# Altium PCB CW308T_to_cardedge.PcbDoc
Units mm, origin at the board's own origin, x right, y up, seen from the top; angles counter-clockwise.
Board outline 58.68 x 84.18 mm, 2 copper layers (Top Layer, Bottom Layer), stack 1.569 mm thick; 4 components, 54 nets, 147 pads, 57 vias.
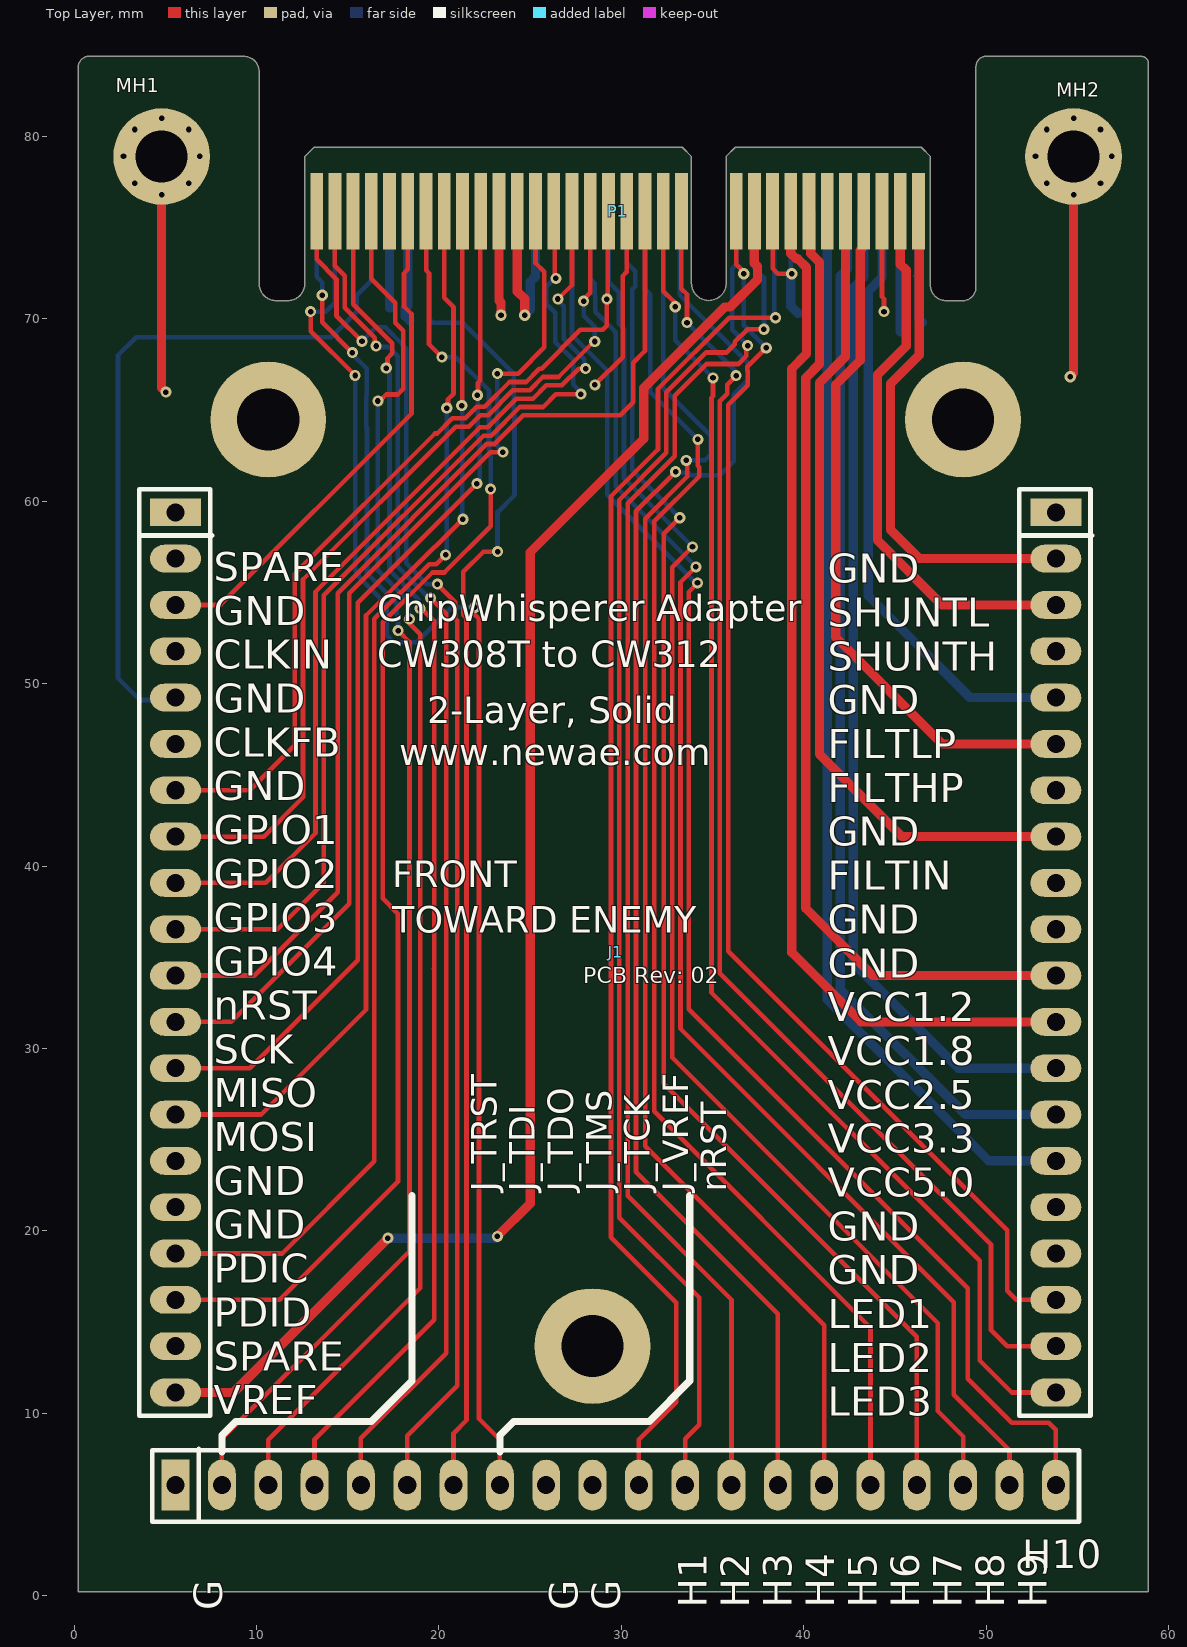
[diagram p0: Top Layer view]
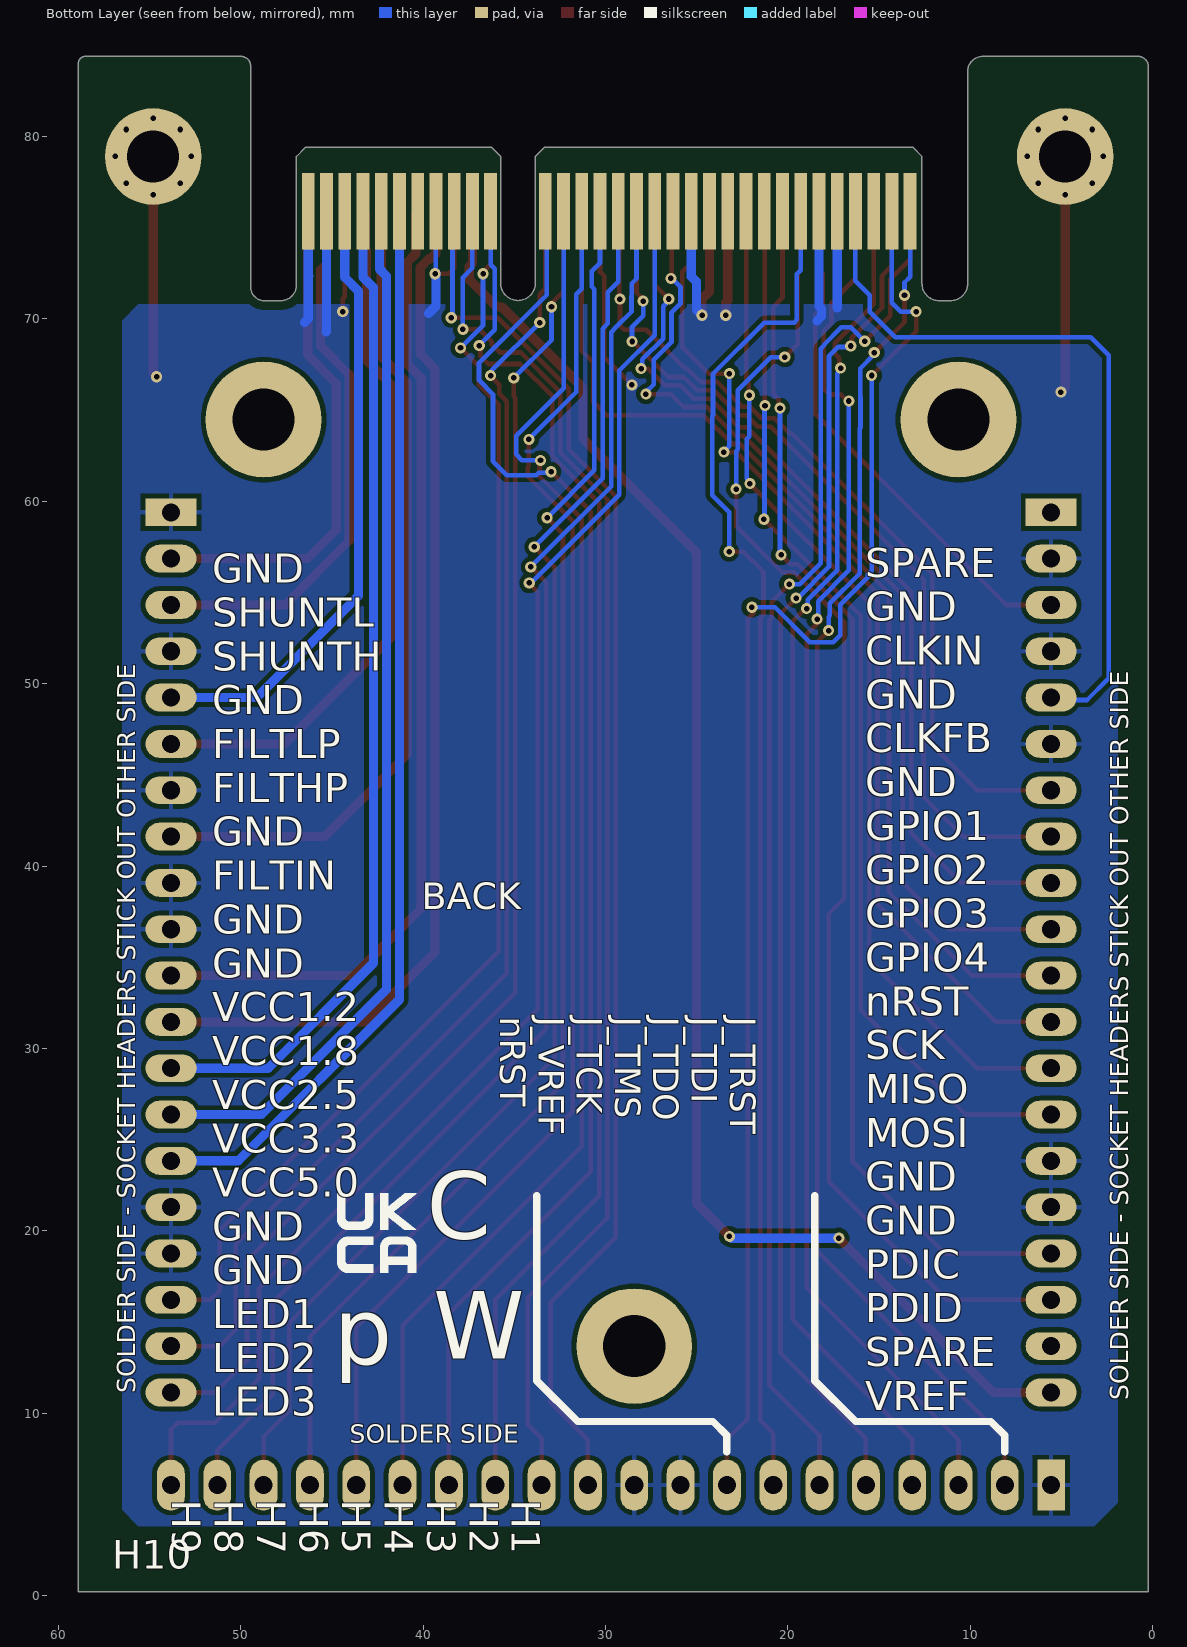
[diagram p1: Bottom Layer view, seen from below]

## Layer stack, top to bottom
Top Solder: solder mask 0.0254, SM-002, Dk 4
Top Layer: signal copper 0.035
Dielectric 1: core 1.4986, Core-043, Dk 4.3
Bottom Layer: signal copper 0.035
Bottom Solder: solder mask 0.0254, SM-002, Dk 4

## Board outline
11.078,71 cw(c11.078,71.935) 10.143,71.935 10.143,83.557 ccw(c9.3,83.557) 9.3,84.4 0.8,84.4 ccw(c0.8,83.825) 0.225,83.825 0.225,0.217 58.899,0.217 58.899,83.148 ccw(c58.899,83.149) 58.9,83.149 58.9,84 ccw(c58.5,84) 58.5,84.4 50,84.4 ccw(c50,83.843) 49.443,83.843 49.443,71.743 cw(c48.7,71.743) 48.7,71 47.8,71 cw(c47.8,71.857) 46.943,71.857 46.943,78.909 46.443,79.409 36.243,79.409 35.743,78.909 35.743,71.959 cw(c34.793,71.959) 33.843,71.959 33.843,78.909 33.343,79.409 13.143,79.409 12.643,78.909 12.643,71.943 cw(c11.7,71.943) 11.7,71

## Design rules (kind name [scope] priority, off if disabled: settings)
BoardOutlineClearance Silk_to_Outline [(OnLayer('Top Overlay'))] p1: gap=0 ignorepadtopadclearanceinfootprint=FALSE
BoardOutlineClearance [All] p2: gap=0.508 ignorepadtopadclearanceinfootprint=FALSE except(0.1: SMDPad-OutlineEdge SMDPad-CavityEdge SMDPad-CutoutEdge SMDPad-SplitBarrior SMDPad-SplitContinuation; 0.203: Track-OutlineEdge Track-CavityEdge Track-CutoutEdge Track-SplitBarrior Track-SplitContinuation)
Clearance Clearance_Power [InNet('+*') OR InNet('-*') OR InNet('GND')] p1: gap=0.254 ignorepadtopadclearanceinfootprint=FALSE
Clearance [All] p2: gap=0.203 ignorepadtopadclearanceinfootprint=FALSE except(0: Arc-Hole Track-Hole SMDPad-Hole THPad-Hole Via-Hole Fill-Hole Poly-Hole Region-Hole Text-Hole)
HoleSize [All] p1: absolutevalues=TRUE maxlimit=5.08 minlimit=0.025 maxpercent=80.000 minpercent=20.000
MinimumSolderMaskSliver [All] p1: minsoldermaskwidth=0.127
PlaneConnect PlaneConnect_viaDirect [IsVia] p1: planeconnectstyle=Direct reliefexpansion=0.508 reliefentries=4 reliefconductorwidth=0.254 reliefairgap=0.254
PlaneConnect [All] p2: planeconnectstyle=Relief reliefexpansion=0.508 reliefentries=4 reliefconductorwidth=0.254 reliefairgap=0.254
PolygonConnect PolygonConnect_viaDirect [All vs isVia] p1: connectstyle=Direct reliefconductorwidth=0.254 reliefentries=4 polygonreliefangle="90 Angle" airgapwidth=0.254
PolygonConnect [All] p2: connectstyle=Relief reliefconductorwidth=0.254 reliefentries=4 polygonreliefangle="90 Angle" airgapwidth=0.254
RoutingVias [All] p1: holewidth=0.711 width=1.27 viastyle="Through Hole" minholewidth=0.305 minwidth=0.61 maxholewidth=2.54 maxwidth=12.7
SilkToSilkClearance [All] p1: silktosilkclearance=0.127
SilkToSolderMaskClearance [IsPad] p1: minsilkscreentomaskgap=0.127 clearancetoexposedcopper=TRUE
SolderMaskExpansion [All] p1: expansion=0.102 istentingtop=FALSE
Width [All] p1: maxlimit=2.54 minlimit=0.152 preferedwidth=0.203 minimp=50.000000 maximp=50.000000 favimp=50.000000
25 further rules are at their usual default settings.

## Classes and differential pairs
component class "Edge Connector": P1

## Components (designator, comment, footprint, x,y, rotation, side; value= is the part's Value field where it differs from the comment)
J1 "CW308_TARGETCON" CW308_TBOARD_CONN 5.559,59.399 r0 top locked
MH1 "4-40 MH, Tight Fit" MOUNT_#4_TIGHT 4.793,78.909 r0 top
MH2 "4-40 MH, Tight Fit" MOUNT_#4_TIGHT 54.793,78.909 r0 top
P1 "PCIeX4-GF-2D-1000-1K-O64" PCIeX4-GF-2D-1000-1K-O64 36.793,75.909 r180 top

## Footprints (in the part's own frame and the unit in brackets; to place one, negate y for a bottom-side part, rotate by r counter-clockwise, add the part's x,y. Pads: shape width x height; smd on the part's side, far side on the other; paste and mask are expansions set on the pad)
CW308_TBOARD_CONN [mil]
  rect 110x60 hole 39: A1(0,0) C1(1900,0)
  oval 110x60 hole 39: A2(0,-100) A3(0,-200) A4(0,-300) A5(0,-400) A6(0,-500) A7(0,-600) A8(0,-700) A9(0,-800) A10(0,-900) A11(0,-1000) A12(0,-1100) A13(0,-1200) A14(0,-1300) A15(0,-1400) A16(0,-1500) A17(0,-1600) A18(0,-1700) A19(0,-1800) A20(0,-1900) C2(1900,-100) C3(1900,-200) C4(1900,-300) C5(1900,-400) C6(1900,-500) C7(1900,-600) C8(1900,-700) C9(1900,-800) C10(1900,-900) C11(1900,-1000) C12(1900,-1100) C13(1900,-1200) C14(1900,-1300) C15(1900,-1400) C16(1900,-1500) C17(1900,-1600) C18(1900,-1700) C19(1900,-1800) C20(1900,-1900)
  rect 60x110 hole 39: B1(0,-2100)
  oval 60x110 hole 39: B2(100,-2100) B3(200,-2100) B4(300,-2100) B5(400,-2100) B6(500,-2100) B7(600,-2100) B8(700,-2100) B9(800,-2100) B10(900,-2100) B11(1000,-2100) B12(1100,-2100) B13(1200,-2100) B14(1300,-2100) B15(1400,-2100) B16(1500,-2100) B17(1600,-2100) B18(1700,-2100) B19(1800,-2100) B20(1900,-2100)
  round 250 hole 134: MH1(200,200) MH2(900,-1800) MH2(1700,200)
  silkscreen extent -79,-2179 1979,50, body extent -50,-2149 1950,50, height 248
MOUNT_#4_TIGHT [mil]
  round 14 hole 12: 1(-82.21,0) 1(-58.13,-58.13) 1(-58.13,58.13) 1(0,-82.21) 1(0,82.21) 1(0,82.21) 1(58.13,-58.13) 1(58.13,58.13) 1(82.21,0)
  round 208.66 hole 112.2: 1(0,0)
PCIeX4-GF-2D-1000-1K-O64 [mm] "Golden finger, PCIeX4, Dual, Opposite, Pitch 1mm, 64-Position"
  rect 0.7x4.2 smd far side paste-1: A1(-9.5,0) A2(-8.5,0) A3(-7.5,0) A4(-6.5,0) A5(-5.5,0) A6(-4.5,0) A7(-3.5,0) A8(-2.5,0) A9(-1.5,0) A10(-0.5,0) A11(0.5,0) A12(3.5,0) A13(4.5,0) A14(5.5,0) A15(6.5,0) A16(7.5,0) A17(8.5,0) A18(9.5,0) A19(10.5,0) A20(11.5,0) A21(12.5,0) A22(13.5,0) A23(14.5,0) A24(15.5,0) A25(16.5,0) A26(17.5,0) A27(18.5,0) A28(19.5,0) A29(20.5,0) A30(21.5,0) A31(22.5,0) A32(23.5,0)
  rect 0.7x4.2 smd paste-1: B1(-9.5,0) B2(-8.5,0) B3(-7.5,0) B4(-6.5,0) B5(-5.5,0) B6(-4.5,0) B7(-3.5,0) B8(-2.5,0) B9(-1.5,0) B10(-0.5,0) B11(0.5,0) B12(3.5,0) B13(4.5,0) B14(5.5,0) B15(6.5,0) B16(7.5,0) B17(8.5,0) B18(9.5,0) B19(10.5,0) B20(11.5,0) B21(12.5,0) B22(13.5,0) B23(14.5,0) B24(15.5,0) B25(16.5,0) B26(17.5,0) B27(18.5,0) B28(19.5,0) B29(20.5,0) B30(21.5,0) B31(22.5,0) B32(23.5,0)

## Part data
J1: library part CW308_TBOARD, "CW308 \"Standard\" Target Board Connector", Component Group=Mechanical, Component Type=Standard, Mounting Technology=Through-hole, Part Number=CW308_TBOARD, Pin Count=60, Pitch=2.54mm
MH1 MH2: library part MOUNT_#4_TIGHT, "Machine screw 4-40 Mounting Hole", Component Group=Mechanical, Component Type=Mechanical, Part Number=MOUNT_#4_TIGHT, Pin Count=1, PP Material Stack=0, PP Rotation=0
P1: library part CMP-0001-00031-2, "Golden finger, PCIeX4, Dual, Opposite, Pitch 1mm, 64-Position", ClassName="Edge Connector", Datasheet Version="rev2.0, Apr-2007", Mating Connector=Molex-87715-9106, Package Reference=PCIeX4-GF-2D-1000-1K-O64, Publisher=Altium

## Via types
v1: diameter 0.61, hole 0.305, Top Layer to Bottom Layer, 57 vias

## Nets (pads, with @x,y where several pads share a name; then routed paths per layer and width w, separated by ;. In a path a pad name is that pad's centre, name@x,y a point inside that pad or via, vN(x,y) a via of type N, cw(c..) or ccw(c..) an arc to the next point about the centre after c; other vN are vias at no path point)
CLKIN: J1.A5 P1.A29 | length 41.3
  Bottom Layer w0.254: J1.A5 5.425,49.105 3.595,49.105 2.4,50.3 2.4,68 3.4,69 14.1,69 15.5,70.4 15.5,71.3 16.293,72.093 P1.A29
CLKIN_n: P1.A30
CLKOUT: J1.A3 P1.B27 | length 28.6
  Top Layer w0.254: J1.A3 8.019,54.319 18.492,64.792 18.492,70.272 18.081,70.683 18.081,72.51 18.293,72.722 P1.B27
CLKOUT_n: P1.B28
FILT_HP: J1.C6 P1.B4 | length 38.5
  Top Layer w0.508: P1.B4 43.197,75.813 43.197,73.862 43.1,73.765 43.1,67.74 41.754,66.394 41.754,52.546 47.601,46.699 J1.C6
FILT_LP: J1.C5 P1.A3 | length 34
  Bottom Layer w0.508: P1.A3 44.293,72.286 43.532,71.525 43.532,54.827 49.12,49.239 J1.C5
FILTIN: J1.C8 P1.B5 | length 45.2
  Top Layer w0.508: P1.B5 42.293,67.939 40.86,66.506 40.86,46.14 45.381,41.619 J1.C8
GND: J1.A2 J1.A4 J1.A6 J1.A15 J1.A16 J1.B1 J1.B9 J1.B10 J1.C1 J1.C4 J1.C7 J1.C9 J1.C10 J1.C16 J1.C17 MH1.1 MH2.1 P1.A1 P1.A2 P1.A8 P1.A20 P1.A27 P1.A28 P1.B3 P1.B9 P1.B15 P1.B21 P1.B22 | length 96.7
  Top Layer w0.254: v1@23.332,70.268 v1(23.4,70.2) ; v1(28.546,66.384) 30.07,67.908 30.07,72.353 30.293,72.576 P1.B15 ; P1.B9 38.293,72.766 38.579,72.48 v1(39.341,72.48) ; P1.B3 44.293,71.213 44.4,71.106 v1(44.4,70.4)
  Top Layer w0.508: MH1.1@4.793,78.909 4.793,76.821 4.793,66.225 v1(5.029,65.989) ; P1.B22 23.293,71.007 23.4,70.9 v1(23.4,70.2) ; P1.B21 24.293,71.507 24.7,71.1 v1(24.7,70.2) ; v1(54.61,66.827) 54.61,66.855 54.793,67.038 MH2.1@54.793,78.909
  Bottom Layer w0.254: P1.A8 39.293,72.528 v1(39.341,72.48) ; 46.13,72.353 46.198,72.421 46.198,75.814 P1.A1
  Bottom Layer w0.508: P1.A28 17.293,70.607 17.3,70.6 ; P1.A27 18.293,70.698 18.158,70.563 18.158,70.142 18.4,69.9 ; v1(24.7,70.2) 24.702,70.2 25,70.498 25,72.035 25.293,72.328 P1.A20 ; v1@39.293,72.528 39.293,70.707 39.7,70.3 ; P1.A2 45.293,69.307 45.3,69.3 ; P1.A1 46.293,70.007 46.5,69.8
GPIO1/TX: J1.A7 P1.B16 | length 46
  Top Layer w0.254: J1.A7 9.623,44.159 12.087,46.623 12.087,56.021 19.783,63.717 19.898,63.717 20.737,64.555 21.452,64.555 22.08,65.183 22.508,65.183 23.867,66.543 24.777,66.543 25.507,67.273 25.625,67.273 27.751,69.399 28.973,69.399 29.203,69.629 v1(29.203,71.083) 29.201,71.083 29.247,71.129 29.247,75.863 P1.B16
GPIO2/RX: J1.A8 P1.B17 | length 48.8
  Top Layer w0.254: J1.A8 10.385,41.619 12.544,43.778 12.544,55.716 20.926,64.098 21.642,64.098 22.27,64.726 22.697,64.726 24.057,66.086 24.966,66.086 25.696,66.816 26.553,66.816 28.501,68.764 v1(28.538,68.764) ; v1(27.933,70.978) 27.933,71.074 28.293,71.434 P1.B17
  Bottom Layer w0.254: v1(27.933,70.978) 27.933,70.174 28.538,69.568 v1(28.538,68.764)
GPIO3: J1.A9 P1.B18 | length 51.5
  Top Layer w0.254: J1.A9 10.512,39.079 13.23,41.797 13.23,55.04 22.25,64.06 22.678,64.06 24.246,65.628 25.156,65.628 25.886,66.359 26.743,66.359 27.657,67.273 v1(28.038,67.273) ; v1(26.524,71.093) 27.293,71.862 P1.B18
  Bottom Layer w0.254: v1(26.524,71.093) 26.524,70.997 26.836,70.686 26.836,68.922 27.97,67.788 27.97,67.341 v1(28.038,67.273)
GPIO4/TRIG: J1.A10 P1.B19 | length 54.7
  Top Layer w0.254: J1.A10 11.147,36.539 13.687,39.079 13.687,54.85 22.44,63.603 22.867,63.603 24.435,65.171 25.709,65.171 26.414,65.876 v1(27.784,65.876) ; P1.B19 26.353,75.849 26.353,72.286 v1(26.412,72.226)
  Bottom Layer w0.254: v1(26.412,72.226) 26.356,72.226 25.885,71.755 25.885,70.835 26.379,70.341 26.379,68.732 27.352,67.759 27.352,66.404 27.784,65.972 v1(27.784,65.876)
HDR1: J1.B11 P1.A9 | length 77.5
  Top Layer w0.254: J1.B11 30.959,8.559 33.013,10.613 33.013,16.07 29.428,19.655 29.428,60.264 32.009,62.844 32.009,66.164 35.912,70.067 v1(38.452,70.067)
  Bottom Layer w0.254: P1.A9 38.384,75.818 38.384,70.135 v1(38.452,70.067)
HDR2: J1.B12 P1.A10 | length 76.7
  Top Layer w0.254: J1.B12 33.499,8.599 34.261,9.361 34.261,16.346 29.886,20.721 29.886,60.075 32.466,62.655 32.466,65.974 34.654,68.162 35.785,68.162 36.225,68.602 36.225,68.738 36.919,69.432 v1(37.817,69.432)
  Bottom Layer w0.254: P1.A10 37.293,72.793 37.817,72.269 v1(37.817,69.432)
HDR3: J1.B13 P1.A11 | length 76.4
  Top Layer w0.254: J1.B13 36.039,16.219 30.343,21.915 30.343,59.885 32.923,62.466 32.923,65.785 34.665,67.527 36.408,67.527 36.851,67.97 36.851,68.466 v1(36.919,68.534)
  Bottom Layer w0.254: P1.A11 36.293,72.963 36.073,72.743 36.073,69.398 36.919,68.552 v1(36.919,68.534)
HDR4: J1.B14 P1.A12 | length 78.9
  Top Layer w0.254: v1(32.978,61.622) 30.8,59.445 30.8,23.236 38.579,15.457 J1.B14
  Bottom Layer w0.254: v1(32.978,61.622) 33.042,61.558 33.663,61.558 33.79,61.431 35.404,61.431 36.166,62.193 36.166,65.867 36.928,66.629 36.928,67.594 33.208,71.314 33.208,75.824 P1.A12
HDR5: J1.B15 P1.A13 | length 77.1
  Top Layer w0.254: v1(33.558,62.244) 33.613,62.189 33.613,61.359 31.3,59.047 31.3,24.641 41.119,14.822 J1.B15
  Bottom Layer w0.254: P1.A13 32.293,66.193 34.896,63.59 34.896,62.571 34.586,62.261 33.575,62.261 v1(33.558,62.244)
HDR6: J1.B16 P1.A14 | length 77
  Top Layer w0.254: v1(34.193,63.395) 34.193,61.951 34.261,61.883 34.261,61.361 31.8,58.9 31.8,26.554 43.659,14.695 J1.B16
  Bottom Layer w0.254: P1.A14 31.293,71.647 31.594,71.346 31.594,65.994 v1(34.193,63.395)
HDR7: J1.B17 P1.A15 | length 77.3
  Top Layer w0.254: v1(33.199,59.099) 32.328,58.228 32.328,28.058 46.199,14.187 J1.B17
  Bottom Layer w0.254: P1.A15 30.293,73.088 30.756,72.626 30.756,71.778 30.603,71.625 30.603,61.695 v1(33.199,59.099)
HDR8: J1.B18 P1.A16 | length 78.8
  Top Layer w0.254: v1(33.9,57.5) 32.786,56.386 32.786,29.505 47.342,14.949 47.342,10.123 48.739,8.726 J1.B18
  Bottom Layer w0.254: P1.A16 29.293,72.033 29.867,71.459 29.867,69.75 30.146,69.471 30.146,61.254 v1(33.9,57.5)
HDR9: J1.B19 P1.A17 | length 80.1
  Top Layer w0.254: v1(34.091,56.409) 33.243,55.562 33.243,31.08 48.231,16.092 48.231,11.012 51.279,7.964 J1.B19
  Bottom Layer w0.254: P1.A17 28.293,72.197 28.546,71.944 28.546,71.263 28.568,71.241 28.568,70.404 29.379,69.594 29.379,69.592 29.689,69.282 29.689,60.811 v1(34.091,56.409)
HDR10: J1.B20 P1.A18 | length 82.5
  Top Layer w0.254: v1(34.176,55.524) 34.176,55.506 33.7,55.03 33.7,32.147 48.993,16.854 48.993,11.901 51.406,9.488 53.438,9.488 53.819,9.107 J1.B20
  Bottom Layer w0.254: P1.A18 27.293,69.111 29.232,67.172 29.232,60.37 33.827,55.774 33.829,55.774 34.08,55.524 v1(34.176,55.524)
IOVREF: J1.A20 P1.B10 | length 83.5
  Top Layer w0.508: J1.A20 8.739,11.139 v1(17.2,19.6) ; v1(23.2,19.7) 25,21.5 25,57.2 31.233,63.433 31.233,66.214 35.67,70.651 35.957,70.651 37.47,72.164 37.47,72.87 37.293,73.047 P1.B10
  Bottom Layer w0.508: v1(17.2,19.6) 23.1,19.6 v1(23.2,19.7)
JTAG_nRST: J1.B8 P1.A31 | length 80.6
  Top Layer w0.254: v1(12.965,70.4) 12.965,69.335 v1(15.4,66.9) ; v1(21.967,54.192) 21.899,54.124 21.899,53.889 21.883,53.873 22.196,53.56 22.196,9.704 23.339,8.561 J1.B8
  Bottom Layer w0.254: v1(12.965,70.4) 13.797,70.4 14.293,70.896 P1.A31 ; v1(15.4,66.9) 15.4,56.2 15.6,56 15.6,55.853 17.127,54.327 17.127,52.651 17.499,52.279 18.79,52.279 20.703,54.192 v1(21.967,54.192)
JTAG_TCK: J1.B6 P1.B32 | length 76.3
  Top Layer w0.254: P1.B32 13.293,73.264 14.379,72.178 14.379,70.18 v1(15.78,68.778) ; J1.B6 18.259,8.759 21,11.5 21,53.462 20.875,53.587 20.875,54.497 v1(19.91,55.462)
  Bottom Layer w0.254: v1(15.78,68.778) 16.537,69.535 17.063,69.535 18,68.598 18,68.571 18.2,68.371 18.2,56.6 19.338,55.462 v1(19.91,55.462)
JTAG_TDI: J1.B3 P1.B29 | length 76
  Top Layer w0.254: J1.B3 10.639,8.539 18.97,16.87 18.97,52.719 v1@18.174,53.515 ; P1.B29 16.293,72.204 17.6,70.897 17.6,69.794 18.035,69.359 18.035,66.161 17.733,65.859 17.106,65.859 16.747,65.5 v1(16.651,65.5)
  Bottom Layer w0.254: v1(16.651,65.5) 16.651,56.21 18.331,54.529 18.331,53.602 v1(18.391,53.541)
JTAG_TDO: J1.B4 P1.B30 | length 74.7
  Top Layer w0.254: J1.B4 13.179,8.579 19.735,15.135 19.735,34.38 ; P1.B30 15.293,70.81 17.435,68.668 17.435,68.113 17.176,67.854 17.176,67.368 v1(17.108,67.3) ; v1(18.966,54.116) 19.053,54.116 19.735,53.434 19.735,34.408 19.707,34.38
  Bottom Layer w0.254: v1(17.108,67.3) 17.108,67.204 17.286,67.026 17.286,56.221 18.898,54.609 18.898,54.184 v1(18.966,54.116)
JTAG_TMS: J1.B5 P1.B31 | length 74.7
  Top Layer w0.254: P1.B31 14.293,72.911 14.836,72.368 14.836,70.621 16.482,68.975 16.482,68.585 v1(16.55,68.517) ; J1.B5 15.719,8.619 20.4,13.3 20.4,53.832 v1(19.541,54.691)
  Bottom Layer w0.254: v1(16.55,68.517) 16.603,68.464 17.236,68.464 17.743,67.957 17.743,56.411 19.462,54.691 v1(19.541,54.691)
JTAG_TRST: J1.B2 P1.A32 | length 76.2
  Top Layer w0.254: J1.B2 8.099,8.599 18.386,18.886 18.386,52.287 17.762,52.911 v1(17.762,52.914) ; v1(13.6,71.3) 13.6,69.813 v1(15.257,68.157)
  Bottom Layer w0.254: P1.A32 13.293,72.303 13.6,71.996 v1(13.6,71.3) ; v1(15.257,68.157) 15.257,68.06 16.035,67.282 16.035,65.782 16.016,65.763 16.016,64.051 16.057,64.01 16.057,56.043 17.693,54.407 17.693,53.727 17.756,53.664 17.756,52.92 v1(17.762,52.914)
JTAG_VREF: J1.B7 P1.A26 | length 74.8
  Top Layer w0.254: J1.B7 20.799,8.899 21.51,9.61 21.51,53.599 21.332,53.777 21.332,56.132 22.44,57.24 v1(23.212,57.24)
  Bottom Layer w0.254: P1.A26 19.293,72.67 19.5,72.463 19.5,69.949 19.649,69.8 21.3,69.8 24.1,67 24.1,64.736 24.139,64.697 24.139,60.339 23.212,59.412 v1(23.212,57.24)
LED1: J1.C18 P1.B11 | length 70
  Top Layer w0.254: P1.B11 36.293,72.988 36.674,72.607 36.674,72.514 v1(36.708,72.48) ; v1(37.944,68.416) 36.911,67.383 36.911,67.172 36.928,67.155 36.928,66.372 35.857,65.302 35.857,35.324 51.152,20.029 51.152,16.727 51.66,16.219 J1.C18
  Bottom Layer w0.254: v1(36.708,72.48) 36.708,69.643 37.935,68.416 v1(37.944,68.416)
LED2: J1.C19 P1.B12 | length 73
  Top Layer w0.254: P1.B12 33.293,71.66 33.6,71.353 v1(33.6,69.8) ; v1(36.293,66.892) 36.293,66.883 35.812,66.403 35.812,65.903 35.4,65.491 35.4,34.13 50.263,19.267 50.263,14.568 51.152,13.679 J1.C19
  Bottom Layer w0.254: v1(33.6,69.8) 36.225,67.175 36.225,66.96 v1(36.293,66.892)
LED3: J1.C20 P1.B13 | length 75.2
  Top Layer w0.254: P1.B13 32.293,71.527 32.864,70.956 32.895,70.956 32.895,70.729 v1(32.956,70.667) ; v1(35.023,66.765) 35.023,65.761 34.943,65.68 34.943,33.063 49.653,18.353 49.653,12.892 51.406,11.139 J1.C20
  Bottom Layer w0.254: v1(32.956,70.667) 32.956,68.832 v1(35.023,66.765)
MISO: J1.A13 P1.B23 | length 56.4
  Top Layer w0.254: J1.A13 9.623,28.919 15.541,34.837 15.541,54.436 v1(22.076,60.971) ; v1(22.108,65.818) 22.142,65.852 22.142,66.504 22.269,66.631 22.269,75.885 P1.B23
  Bottom Layer w0.254: v1(22.076,60.971) 22.076,61.067 22.244,61.235 22.244,63.416 22.12,63.541 22.12,65.806 v1(22.108,65.818)
MOSI: J1.A14 P1.B24 | length 58.9
  Top Layer w0.254: J1.A14 10.258,26.379 15.998,32.119 15.998,53.742 19.76,57.503 19.792,57.503 v1(21.307,59.018) ; v1(21.248,65.249) 21.271,65.271 21.271,75.887 P1.B24
  Bottom Layer w0.254: v1(21.248,65.249) 21.278,65.22 21.278,59.047 v1(21.307,59.018)
nRST: J1.A11 P1.B14 | length 58.5
  Top Layer w0.254: J1.A11 9.877,33.999 14.449,38.571 14.449,54.966 22.629,63.146 23.057,63.146 24.625,64.714 29.939,64.714 30.649,65.424 30.649,67.598 31.293,68.242 P1.B14
nRST_OUT: P1.A19
PDIC: J1.A17 P1.B25 | length 67.3
  Top Layer w0.254: J1.A17 11.401,18.759 16.456,23.814 16.456,53.552 19.458,56.554 19.859,56.554 v1(20.367,57.062) ; P1.B25 20.293,71.155 20.799,70.649 20.799,65.892 20.496,65.588 20.496,65.182 v1(20.427,65.114)
  Bottom Layer w0.254: v1(20.367,57.062) 20.427,57.122 v1(20.427,65.114)
PDID: J1.A18 P1.B26 | length 73.2
  Top Layer w0.254: J1.A18 11.274,16.219 17.751,22.696 17.751,37.39 16.913,38.228 16.913,53.363 19.647,56.097 20.3,56.097 22.831,58.628 v1(22.831,60.669) ; P1.B26 19.293,72.67 19.453,72.51 19.453,68.619 v1(20.164,67.908)
  Bottom Layer w0.254: v1(20.164,67.908) 20.928,67.908 22.743,66.093 22.743,62.833 22.831,62.745 v1(22.831,60.669)
SCK: J1.A12 P1.B20 | length 56.1
  Top Layer w0.254: J1.A12 8.607,31.459 15.084,37.936 15.084,54.954 22.819,62.689 23.497,62.689 v1(23.504,62.696) ; v1(23.2,67) 24.336,67 25.777,68.441 25.777,72.582 25.293,73.067 P1.B20
  Bottom Layer w0.254: v1(23.2,67) 23.2,63.022 23.504,62.718 v1(23.504,62.696)
SHUNTH: J1.C3 P1.B2 | length 30.1
  Top Layer w0.508: P1.B2 45.293,73.005 45.615,72.683 45.615,68.515 44.04,66.94 44.04,57.86 47.581,54.319 J1.C3
SHUNTL: J1.C2 P1.B1 | length 27.9
  Top Layer w0.508: P1.B1 46.326,75.876 46.326,68.026 44.751,66.451 44.751,58.449 46.341,56.859 J1.C2
TRACECLK: P1.A21
TRACED0: P1.A22
TRACED1: P1.A23
TRACED2: P1.A24
TRACED3: P1.A25
VCC1.0: P1.B6
VCC1.2: J1.C11 P1.B7 | length 54
  Top Layer w0.508: P1.B7 40.389,75.813 40.389,73.587 40.865,73.111 40.865,67.527 40.103,66.765 40.103,37.682 43.786,33.999 J1.C11
VCC1.8: J1.C12 P1.B8 | length 57.4
  Top Layer w0.508: P1.B8 39.293,73.59 39.591,73.293 39.678,73.293 40.154,72.817 40.154,68.086 39.341,67.273 39.341,35.269 43.151,31.459 J1.C12
VCC2.5: J1.C13 P1.A4 | length 54.9
  Bottom Layer w0.508: P1.A4 43.293,72.292 42.719,71.718 42.719,34.685 48.485,28.919 J1.C13
VCC3.3: J1.C14 P1.A5 | length 57.5
  Bottom Layer w0.508: P1.A5 42.389,75.813 42.389,73.155 42.389,72.734 42.008,72.353 42.008,33.237 48.866,26.379 J1.C14
VCC5.0: J1.C15 P1.A6 | length 59.4
  Bottom Layer w0.508: P1.A6 41.293,32.682 50.136,23.839 J1.C15
VCCADJ: P1.A7
pads on no net: J1.A1 J1.A19 J1.MH1 J1.MH2

## Polygon pours and split planes (outlines as drawn)
GND on Bottom Layer "GND_L02_P000" (solid, remove dead copper, pour order 0): 55.6,70.8 56.5,69.9 56.5,4.7 55.6,3.8 3.2,3.8 1.9,5.1 1.9,70.2 2.5,70.8

## Silkscreen, mask and mechanical layers (free items; w line width, h text height)
Top Overlay:
  lines w0.4: 8.103,7.874 8.103,8.788 8.865,9.55 16.281,9.55 18.517,11.786 18.517,21.92 ; 23.343,7.874 23.343,8.788 24.105,9.55 31.521,9.55 33.757,11.786 33.757,21.92
  text "ChipWhisperer Adapter / CW308T to CW312" at 16.612,50.419 h2.5
  text "2-Layer, Solid" at 19.355,47.346 h2.5
  text "www.newae.com" at 17.831,45.034 h2.5
  text "FRONT / TOWARD ENEMY" at 17.444,35.839 h2.5
  text "PCB Rev: 02" at 27.915,33.274 h1.5
  text "J_TRST / J_TDI / J_TDO / J_TMS / J_TCK / J_VREF / nRST" at 35.763,22.149 h1.4 r90
  text "SPARE / GND / CLKIN / GND / CLKFB / GND / GPIO1 / GPIO2 / GPIO3 / GPIO4 / nRST / SCK / MISO / MOSI / GND / GND / PDIC / PDID / SPARE / VREF" at 7.645,9.94 h1.6
  text "GND / SHUNTL / SHUNTH / GND / FILTLP / FILTHP / GND / FILTIN / GND / GND / VCC1.2 / VCC1.8 / VCC2.5 / VCC3.3 / VCC5.0 / GND / GND / LED1 / LED2 / LED3" at 41.325,9.851 h1.6
  text "H10" at 51.968,1.499 h1.55
  text "H1 / H2 / H3 / H4 / H5 / H6 / H7 / H8 / H9" at 53.315,-0.66 h1.55 r90
  text "G" at 8.128,-0.787 h1.55 r90
  text "G / G" at 29.947,-0.813 h1.55 r90
Bottom Overlay:
  drawing of 14 lines, arcs and shapes, not listed
  text "BACK" at 40.062,37.135 h2.5
  text "J_TRST / J_TDI / J_TDO / J_TMS / J_TCK / J_VREF / nRST" at 35.763,31.736 h1.4 r90
  text "C" at 39.802,18.339 h6.35
  text "W" at 39.446,11.76 h6.35
  text "p" at 44.907,11.455 h6.35
  text "SOLDER SIDE - SOCKET HEADERS STICK OUT OTHER SIDE" at 55.783,11.1 h1 r270
  text "SOLDER SIDE - SOCKET HEADERS STICK OUT OTHER SIDE" at 1.326,10.719 h1 r270
  text "SPARE / GND / CLKIN / GND / CLKFB / GND / GPIO1 / GPIO2 / GPIO3 / GPIO4 / nRST / SCK / MISO / MOSI / GND / GND / PDIC / PDID / SPARE / VREF" at 15.757,10.169 h1.6
  text "GND / SHUNTL / SHUNTH / GND / FILTLP / FILTHP / GND / FILTIN / GND / GND / VCC1.2 / VCC1.8 / VCC2.5 / VCC3.3 / VCC5.0 / GND / GND / LED1 / LED2 / LED3" at 51.562,9.851 h1.6
  text "SOLDER SIDE" at 44.018,8.375 h1
  text "H1 / H2 / H3 / H4 / H5 / H6 / H7 / H8 / H9" at 53.746,5.258 h1.55 r90
  text "H10" at 57.048,1.473 h1.55
Mechanical 1:
  lines w0.1: 0.225,0.217 0.225,82.767 0.225,83.825 cw(c0.8,83.825) 0.8,84.4 9.3,84.4 cw(c9.3,83.557) 10.143,83.557 10.143,73.662 10.143,71.935 ccw(c11.078,71.935) 11.078,71 11.7,71 ccw(c11.7,71.943) 12.643,71.943 12.643,73.662 12.643,78.909 13.143,79.409 33.343,79.409 33.843,78.909 33.843,71.959 ccw(c34.793,71.959) 35.743,71.959 35.743,78.909 36.243,79.409 46.443,79.409 46.943,78.909 46.943,73.697 46.943,71.857 ccw(c47.8,71.857) 47.8,71 48.7,71 ccw(c48.7,71.743) 49.443,71.743 49.443,83.843 cw(c50,83.843) 50,84.4 58.5,84.4 cw(c58.5,84) 58.9,84 58.9,83.149 cw(c58.899,83.149) 58.899,83.148 58.899,0.217 0.225,0.217